# Altium PCB tang2.PcbDoc
Units mm, origin at the board's own origin, x right, y up, seen from the top; angles counter-clockwise.
Board outline 140.6 x 80.6 mm, 2 copper layers (Top Layer, Bottom Layer); 22 components, 26 nets, 111 pads, 0 vias.
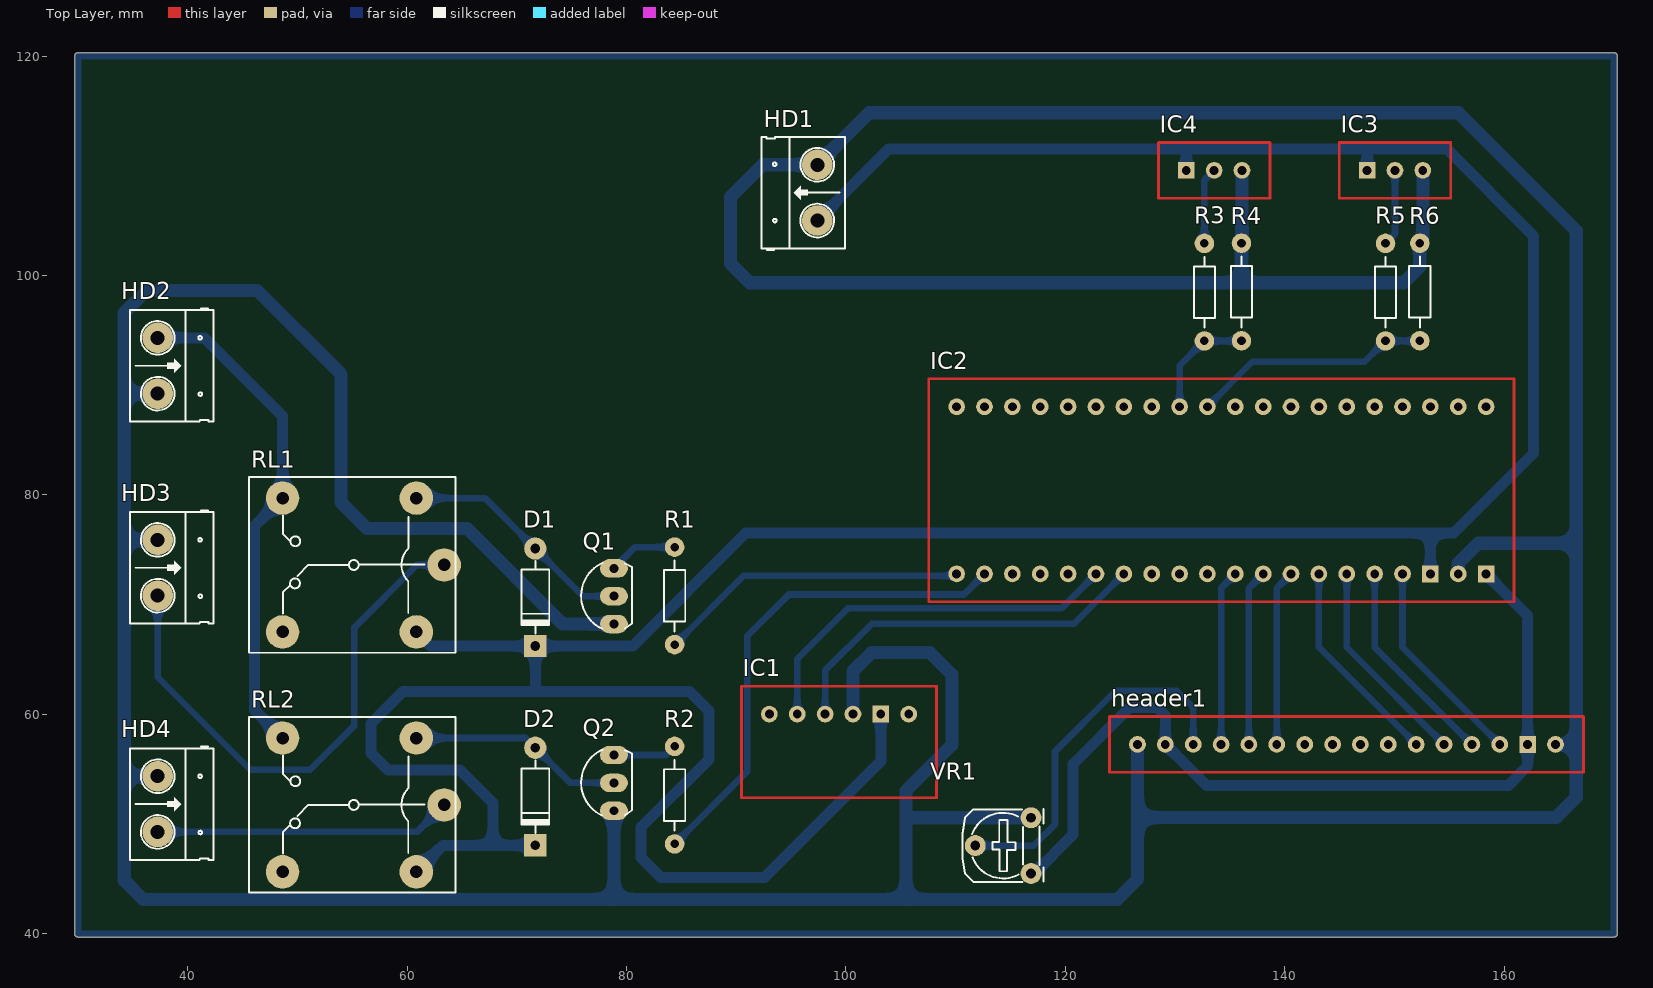
[diagram p0: Top Layer view]
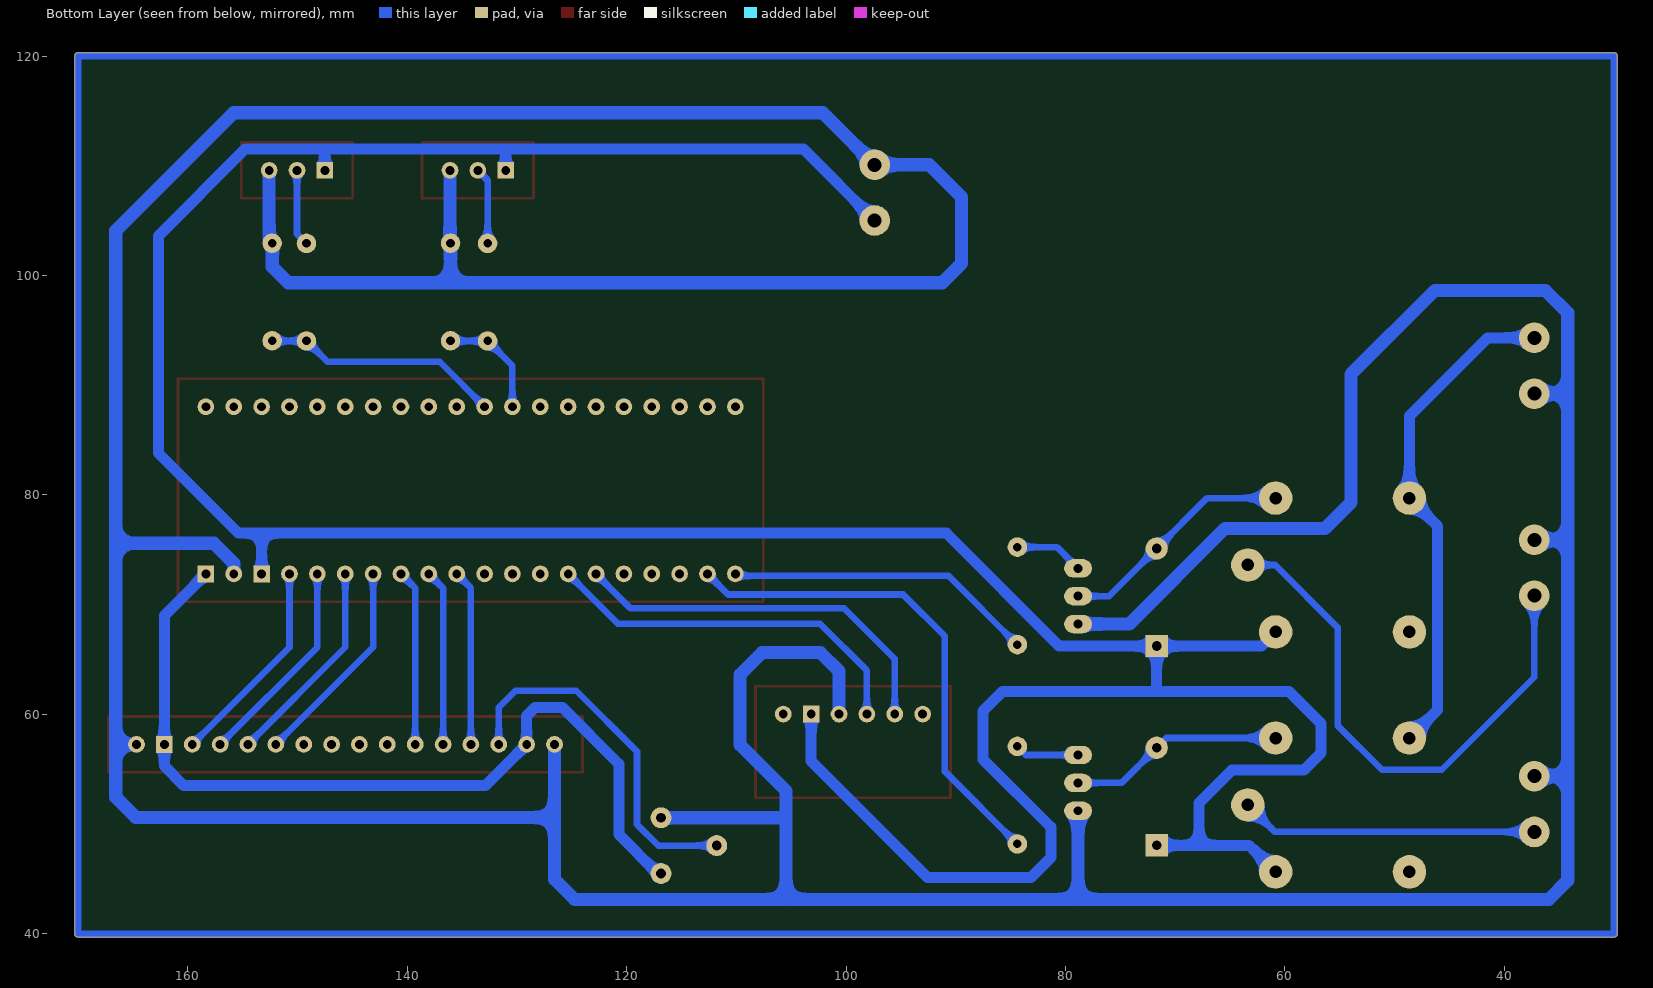
[diagram p1: Bottom Layer view, seen from below]
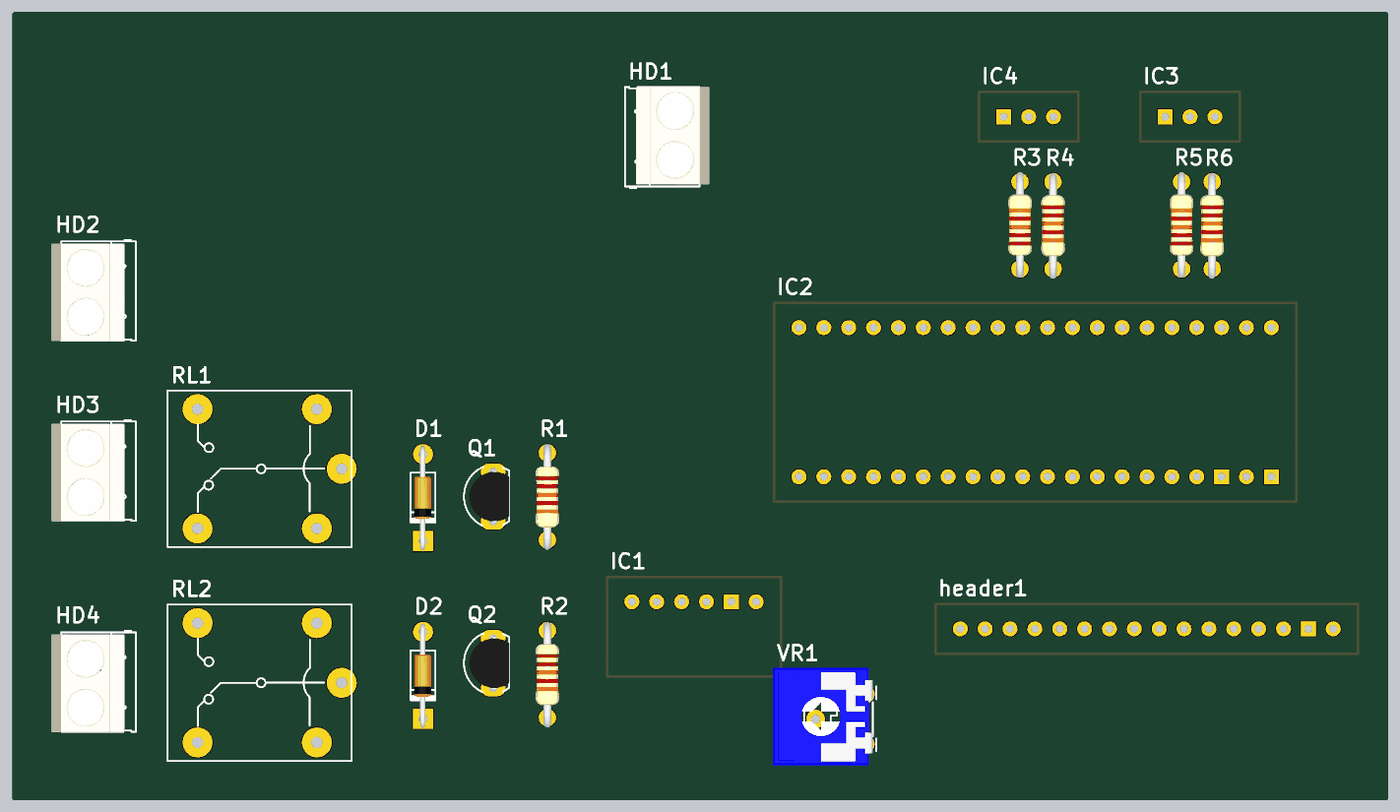
[diagram p2: 3D render of the assembled board from above, using the file's embedded part models]

## Layer stack, top to bottom
Top Solder: solder mask 0.0102, Solder Resist, Dk 3.5
Top Layer: signal copper 0.0356
Dielectric 1: dielectric 0.32, FR-4, Dk 4.8
Bottom Layer: signal copper 0.0356
Bottom Solder: solder mask 0.0102, Solder Resist, Dk 3.5

## Board outline
30,39.7 cw(c30,40) 29.7,40 29.7,120 cw(c30,120) 30,120.3 170,120.3 cw(c170,120) 170.3,120 170.3,40 cw(c170,40) 170,39.7

## Design rules (kind name [scope] priority, off if disabled: settings)
Clearance [All] p1: gap=0.4
PolygonConnect [All] p1: connectstyle=Relief reliefconductorwidth=0.254 reliefentries=4 polygonreliefangle="90 Angle" airgapwidth=0.254
RoutingLayers [All] p1: top layer_v5=FALSE bottom layer_v5=TRUE
RoutingVias [All] p1: holewidth=0.711 width=1.27 viastyle="Through Hole" minholewidth=0.711 minwidth=1.27 maxholewidth=0.711 maxwidth=1.27
SolderMaskExpansion [All] p1: expansion=0.102
Width NET [InNetClass('NET CLASS')] p1: maxlimit=0.6 minlimit=0.6 preferedwidth=0.6
Width GND [InNet('GND')] p2: maxlimit=1.2 minlimit=1.2 preferedwidth=1.2
Width 3v3 [InNet('3V3')] p3: maxlimit=1 minlimit=1 preferedwidth=1
Width 12V [InNet('12V')] p4: maxlimit=1 minlimit=1 preferedwidth=1
Width 5V [InNet('5V')] p5: maxlimit=1 minlimit=1 preferedwidth=1
29 further rules are at their usual default settings.

## Classes and differential pairs
net class "NET CLASS": NetD1_1 NetD2_1 NetHD3_2 NetHD4_2 Netheader1_3 NetIC3_2 NetIC4_2 NetQ1_3 NetQ2_3 PA6 PA7 PA9 PA10 PB3 PB4 PB5 PB6 PB7 PB8 PB9 PB12 PB13

## Components (designator, comment, footprint, x,y, rotation, side; value= is the part's Value field where it differs from the comment)
D1 "1N4007" D1A 71.683,75.108 r90 top
D2 "1N4007" D1A 71.683,56.947 r90 top
HD1 "Header 2" HED2 97.384,105.004 r90 top
HD2 "Header 2" HED2 37.262,94.31 r270 top
HD3 "Header 2" HED2 37.262,75.895 r270 top
HD4 "Header 2" HED2 37.262,54.356 r270 top
header1 "HEADER16" header16_pin 126.568,57.252 r0 top
IC1 "HC05" HC05_Pin 98.095,67.64 r270 top
IC2 "STM32F103" STM32 135.484,72.796 r0 top
IC3 "ACS712" PCBComponent_1 139.878,112.116 r0 top
IC4 "ACS712" PCBComponent_1 123.393,112.116 r0 top
Q1 "C1815" QTO-92 78.845,70.764 r90 top
Q2 "C1815" QTO-92 78.845,53.746 r90 top
R1 "4k7" R1/4W 84.383,66.345 r90 top
R2 "4k7" R1/4W 84.383,48.184 r90 top
R3 "5k" R1/4W 132.664,102.921 r270 top
R4 "5k" R1/4W 136.042,94.046 r90 top
R5 "5k" R1/4W 149.174,102.921 r270 top
R6 "5k" R1/4W 152.298,94.046 r90 top
RL1 "Relay 10A/5V" RL_SPDT_10A 63.375,73.609 r180 top
RL2 "Relay 10A/5V" RL_SPDT_10A 63.375,51.74 r180 top
VR1 "10K" VR 116.865,45.491 r90 top

## Footprints (in the part's own frame and the unit in brackets; to place one, negate y for a bottom-side part, rotate by r counter-clockwise, add the part's x,y. Pads: shape width x height; smd on the part's side, far side on the other; paste and mask are expansions set on the pad)
D1A [mil] "Diode 1A, W 100mil, L 350mil"
  round 80 hole 35: 1(0,0)
  rect 80x80 hole 35: 2(-350,0)
  silkscreen extent -305,-50 -45,50, body extent -386,-33 34,36, height 84
HC05_Pin [mil]
  round 60 hole 31.5: 1(300,300) 3(300,100) 4(300,0) 5(300,-100) 6(300,-200)
  rect 60x60 hole 31.5: 2(300,200)
  Top Layer lines w10: 600,-300 600,400 200,400 200,-300 600,-300
header16_pin [mil]
  round 60 hole 31.5: 1(0,0) 2(100,0) 3(200,0) 4(300,0) 5(400,0) 6(500,0) 7(600,0) 8(700,0) 9(800,0) 10(900,0) 11(1000,0) 12(1100,0) 13(1200,0) 14(1300,0) 16(1500,0)
  rect 60x60 hole 31.5: 15(1400,0)
  Top Layer lines w10: -100,-100 1600,-100 1600,100 -100,100 -100,-100
HED2 [mil] "Header 2, 2 pin, hight 300mil, Pin to Pin 200, Colour Green"
  round 110 hole 50: 1(0,0) 2(200,0)
  silkscreen extent -106,-100 300,200, body extent -92,-140 302,155, height 394
PCBComponent_1 [mil]
  rect 60x60 hole 31.5: 1(300,-100)
  round 60 hole 31.5: 2(400,-100) 3(500,-100)
  Top Layer lines w10: 200,-200 200,0 600,0 600,-200 200,-200
QTO-92 [mil] "TO-92"
  oval 66x100 hole 32: 1(-100,0) 2(0,0) 3(100,0)
  silkscreen extent -117,-65 120,118, body extent -109,-66 109,95, height 245
R1/4W [mil] "R 1/4W, 2 Pin, 350mil"
  round 70 hole 31: 1(0,0) 2(350,0)
  silkscreen extent 48,-38 302,38, body extent -40,-47 386,47, height 111
RL_SPDT_10A [mil] "Relay SPDT, 5 pin, 10A,W 650mil, L 800mil, H 800mil"
  round 120 hole 45: 1(0,0) 2(580,240) 3(580,-240) 4(100,-240) 5(100,240)
  silkscreen extent -40,-315 700,315
STM32 [mil]
  round 60 hole 31.5: 1(-1000,600) 2(-900,600) 3(-800,600) 4(-700,600) 5(-600,600) 6(-500,600) 7(-400,600) 8(-300,600) 9(-200,600) 10(-100,600) 11(0,600) 12(100,600) 13(200,600) 14(300,600) 15(400,600) 16(500,600) 17(600,600) 18(700,600) 19(800,600) 20(900,600) 21(-1000,0) 22(-900,0) 23(-800,0) 24(-700,0) 25(-600,0) 26(-500,0) 27(-400,0) 28(-300,0) 29(-200,0) 30(-100,0) 31(0,0) 32(100,0) 33(200,0) 34(300,0) 35(400,0) 36(500,0) 37(600,0) 39(800,0)
  rect 60x60 hole 31.5: 38(700,0) 40(900,0)
  Top Layer lines w10: -1100,-100 -1100,700 1000,700 1000,-100 -1100,-100
VR [mil] "Resistor Variable"
  round 75 hole 35: 1(0,0) 2(100,200) 3(200,0)
  silkscreen extent -31,-44 231,246, body extent -87,-30 307,372, height 165

## Part data
D1 D2: library part D1A, "Diode 1A"
HD1 HD2 HD3 HD4: library part Hed2, "Header 2 (Green)"
Q1 Q2: "NPN 600mW, ECB"
R1 R2 R3 R4 R5 R6: library part R1/4W, "Resistor 1/4W"
RL1 RL2: library part "Relay 1", "Relay SPDT,10A - 12VDC 5 Pin"
VR1: library part VR, "Var Resistor"

## Nets (pads, with @x,y where several pads share a name; then routed paths per layer and width w, separated by ;. In a path a pad name is that pad's centre, name@x,y a point inside that pad or via, vN(x,y) a via of type N, cw(c..) or ccw(c..) an arc to the next point about the centre after c; other vN are vias at no path point)
3V3: header1.2 header1.15 IC2.40 VR1.1 | length 79.6
  Bottom Layer w1: VR1.1 117.165,45.491 120.701,49.027 120.701,55.448 125.857,60.604 128.346,60.604 129.108,59.843 header1.2 132.842,53.518 160.376,53.518 162.128,55.27 header1.15 162.128,69.012 IC2.40
5V: D1.2 D2.2 HD1.1 IC1.2 IC2.38 IC3.1 IC4.1 RL1.5 RL2.5 | length 323.8
  Bottom Layer w1: RL2.5 63.248,48.057 67.818,48.057 ; RL1.5 62.13,66.218 D1.2 ; D2.2 67.818,48.057 ; HD1.1 103.886,111.506 130.912,111.506 ; IC1.2 103.175,55.728 92.583,45.136 83.134,45.136 81.331,46.939 81.331,49.708 87.503,55.88 87.503,60.3 85.725,62.078 71.679,62.078 ; IC4.1 131.013,111.404 130.912,111.506 ; IC3.1 147.498,111.43 147.422,111.506 ; IC2.38 153.264,76.505 ; 67.818,48.057 67.818,51.922 64.825,54.915 58.242,54.915 56.693,56.464 56.693,59.157 59.614,62.078 71.679,62.078 ; 71.679,62.078 71.683,62.082 D1.2 ; D1.2 80.569,66.218 90.856,76.505 153.264,76.505 ; 130.912,111.506 147.422,111.506 ; 147.422,111.506 154.762,111.506 162.662,103.607 162.662,83.795 155.372,76.505 153.264,76.505
12V: HD2.1 RL1.3 RL2.3 | length 45.8
  Bottom Layer w1: HD2.1 41.529,94.31 48.643,87.196 RL1.3 46.101,77.163 46.101,60.378 RL2.3
GND: HD1.2 HD2.2 HD3.1 HD4.1 header1.1 header1.16 IC1.3 IC2.39 IC3.3 IC4.3 Q1.1 Q2.1 R4.2 R6.2 VR1.3 | length 568.8
  Bottom Layer w1.2: HD4.1 34.214,54.356 ; HD3.1 34.214,75.895 ; HD2.2 34.214,89.23 ; Q2.1 78.845,43.12 ; Q1.1 74.168,68.224 65.456,76.937 56.337,76.937 53.975,79.299 53.975,90.983 46.33,98.628 36.246,98.628 34.214,96.596 34.214,89.23 ; IC1.3 100.635,63.932 102.337,65.634 107.645,65.634 109.652,63.627 109.652,57.201 105.461,53.01 105.461,43.12 ; 105.74,50.571 VR1.3 ; header1.1 126.568,50.597 ; IC4.3 136.093,102.987 R4.2 136.042,99.327 ; IC3.3 152.578,103.215 R6.2 152.298,100.787 150.838,99.327 136.042,99.327 ; IC2.39 155.804,73.762 157.632,75.59 166.567,75.59 ; header1.16 166.567,57.252 ; 34.214,54.356 34.214,75.895 ; 34.214,54.356 34.214,44.856 35.95,43.12 78.845,43.12 ; 34.214,75.895 34.214,89.23 ; 78.845,43.12 105.461,43.12 ; 105.461,43.12 124.73,43.12 126.568,44.958 126.568,50.597 ; 126.568,50.597 164.732,50.597 166.567,52.432 166.567,57.252 ; 136.042,99.327 91.224,99.327 89.459,101.092 89.459,107.137 92.405,110.084 HD1.2 102.121,114.821 155.816,114.821 166.567,104.07 166.567,75.59 ; 166.567,57.252 166.567,75.59
NetD1_1: D1.1 Q1.2 RL1.4 | length 21.7
  Bottom Layer w0.6: RL1.4 67.086,79.705 D1.1 76.027,70.764 Q1.2
NetD2_1: D2.1 Q2.2 RL2.4 | length 19.7
  Bottom Layer w0.6: RL2.4 70.794,57.836 D2.1 74.884,53.746 Q2.2
NetHD3_2: HD3.2 RL1.1 | length 50
  Bottom Layer w0.6: HD3.2 37.262,63.373 45.695,54.94 51.156,54.94 55.194,58.979 55.194,67.92 60.884,73.609 RL1.1
NetHD4_2: HD4.2 RL2.1 | length 27.1
  Bottom Layer w0.6: HD4.2 60.911,49.276 RL2.1
Netheader1_3: header1.3 VR1.2 | length 33.6
  Bottom Layer w0.6: VR1.2 117.119,48.031 119.05,49.962 119.05,56.617 124.587,62.154 130.124,62.154 131.648,60.63 header1.3
NetIC3_2: IC3.2 R5.1 | length 7
  Bottom Layer w0.6: R5.1 150.038,103.784 IC3.2
NetIC4_2: IC4.2 R3.1 | length 7
  Bottom Layer w0.6: R3.1 132.664,108.687 IC4.2
NetQ1_3: Q1.3 R1.2 | length 6.3
  Bottom Layer w0.6: Q1.3 80.776,75.235 R1.2
NetQ2_3: Q2.3 R2.2 | length 5.9
  Bottom Layer w0.6: Q2.3 83.595,56.286 R2.2
PA6: IC2.10 R5.2 R6.1 | length 21.8
  Bottom Layer w0.6: IC2.10 137.034,92.126 147.269,92.126 R5.2 152.283,94.031 R6.1
PA7: IC2.9 R3.2 R4.1 | length 10.3
  Bottom Layer w0.6: IC2.9 130.404,91.771 R3.2 136.027,94.031 R4.1
PA9: IC1.5 IC2.26 | length 35.5
  Bottom Layer w0.6: IC1.5 95.555,65.049 100.152,69.647 119.635,69.647 IC2.26
PA10: IC1.4 IC2.27 | length 34.8
  Bottom Layer w0.6: IC1.4 98.095,63.983 102.362,68.25 120.778,68.25 IC2.27
PB3: header1.4 IC2.31 | length 16.1
  Bottom Layer w0.6: header1.4 134.188,71.5 IC2.31
PB4: header1.5 IC2.32 | length 16.1
  Bottom Layer w0.6: header1.5 136.728,71.5 IC2.32
PB5: header1.6 IC2.33 | length 16.1
  Bottom Layer w0.6: header1.6 139.268,71.5 IC2.33
PB6: header1.11 IC2.34 | length 19.2
  Bottom Layer w0.6: IC2.34 143.104,66.116 header1.11
PB7: header1.12 IC2.35 | length 19.2
  Bottom Layer w0.6: IC2.35 145.644,66.116 header1.12
PB8: header1.13 IC2.36 | length 19.2
  Bottom Layer w0.6: IC2.36 148.184,66.116 header1.13
PB9: header1.14 IC2.37 | length 19.2
  Bottom Layer w0.6: IC2.37 150.724,66.116 header1.14
PB12: IC2.21 R1.1 | length 28.4
  Bottom Layer w0.6: R1.1 90.657,72.619 109.907,72.619 IC2.21
PB13: IC2.22 R2.1 | length 45.7
  Bottom Layer w0.6: R2.1 90.983,54.784 90.983,67.107 94.793,70.917 110.745,70.917 IC2.22
pads on no net: header1.7 header1.8 header1.9 header1.10 IC1.1 IC1.6 IC2.1 IC2.2 IC2.3 IC2.4 IC2.5 IC2.6 IC2.7 IC2.8 IC2.11 IC2.12 IC2.13 IC2.14 IC2.15 IC2.16 IC2.17 IC2.18 IC2.19 IC2.20 IC2.23 IC2.24 IC2.25 IC2.28 IC2.29 IC2.30 RL1.2 RL2.2
copper on no net: | length 440
  Bottom Layer w0.6: 30,40 170,40 170,110 170,120 30,120 30,110 30,40